# Altium PCB LpfFilter.PcbDoc
Units mil, origin at the board's own origin, x right, y up, seen from the top; angles counter-clockwise.
Board outline 2344.52 x 1602.39 mil, 2 copper layers (Top Layer, Bottom Layer), stack 12.8 mil thick; 16 components, 11 nets, 47 pads, 0 vias.
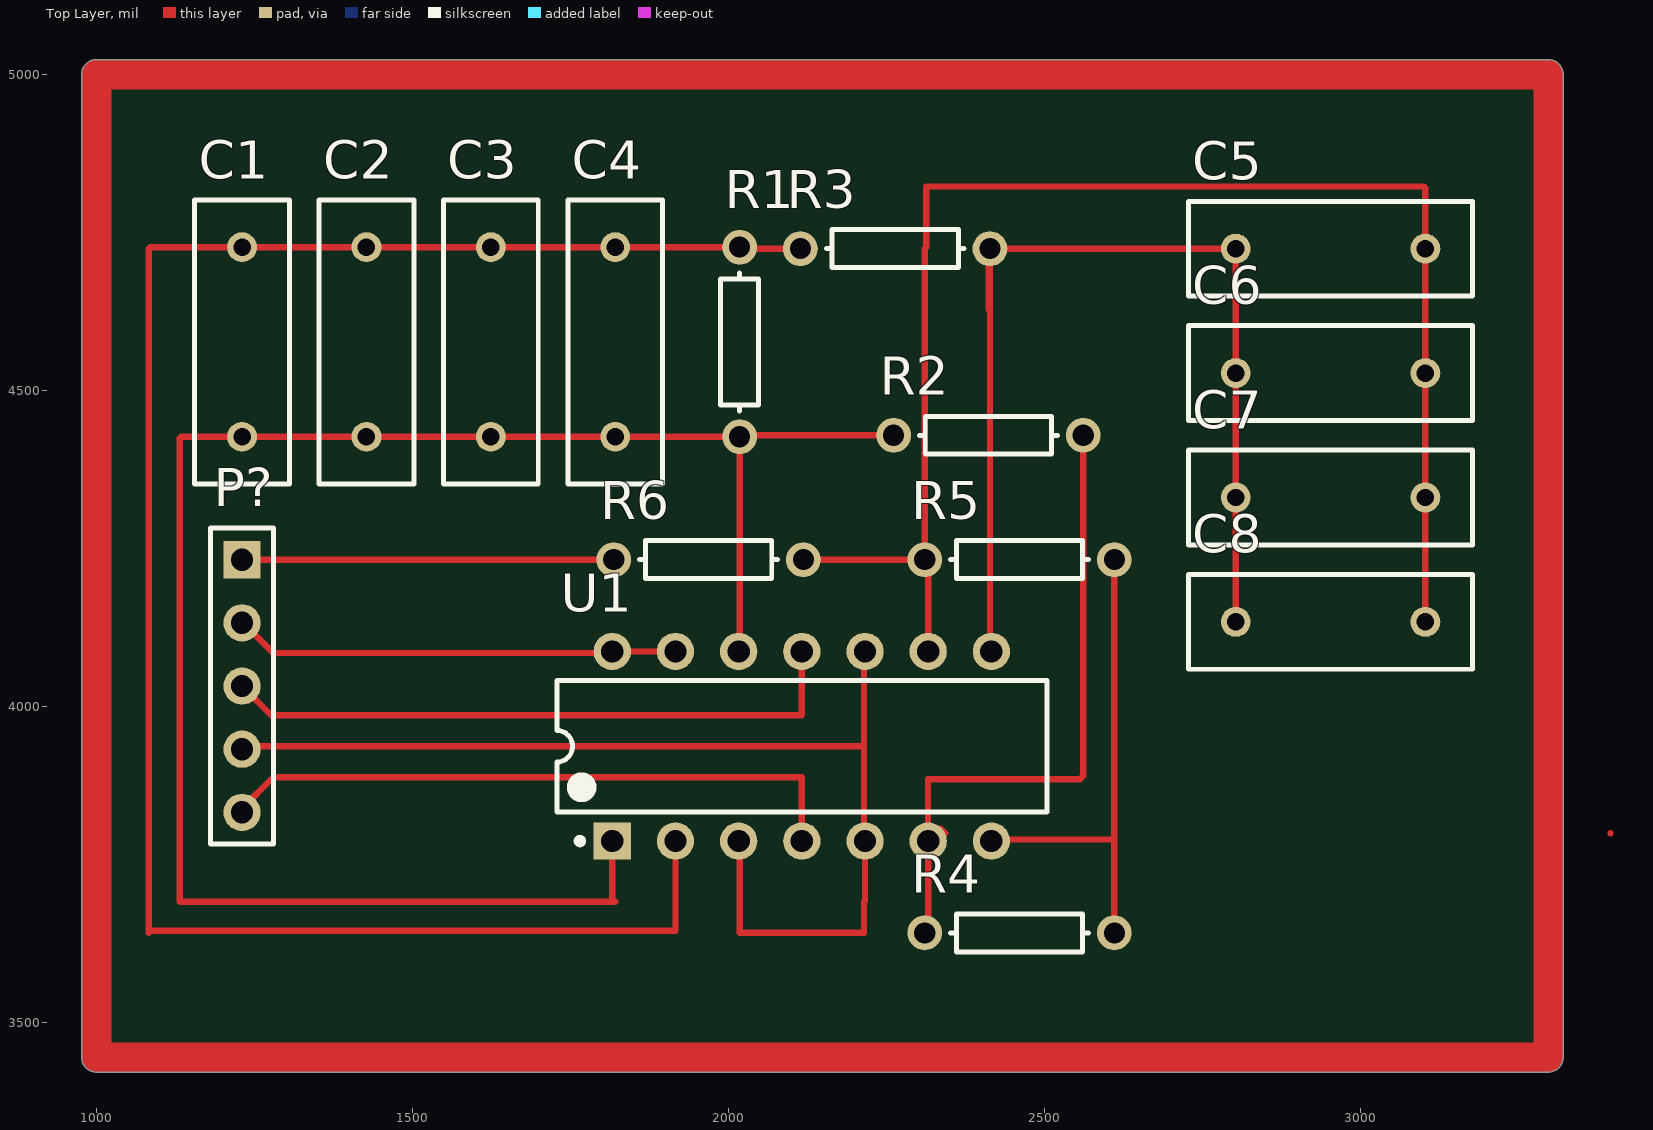
[diagram p0: Top Layer view]
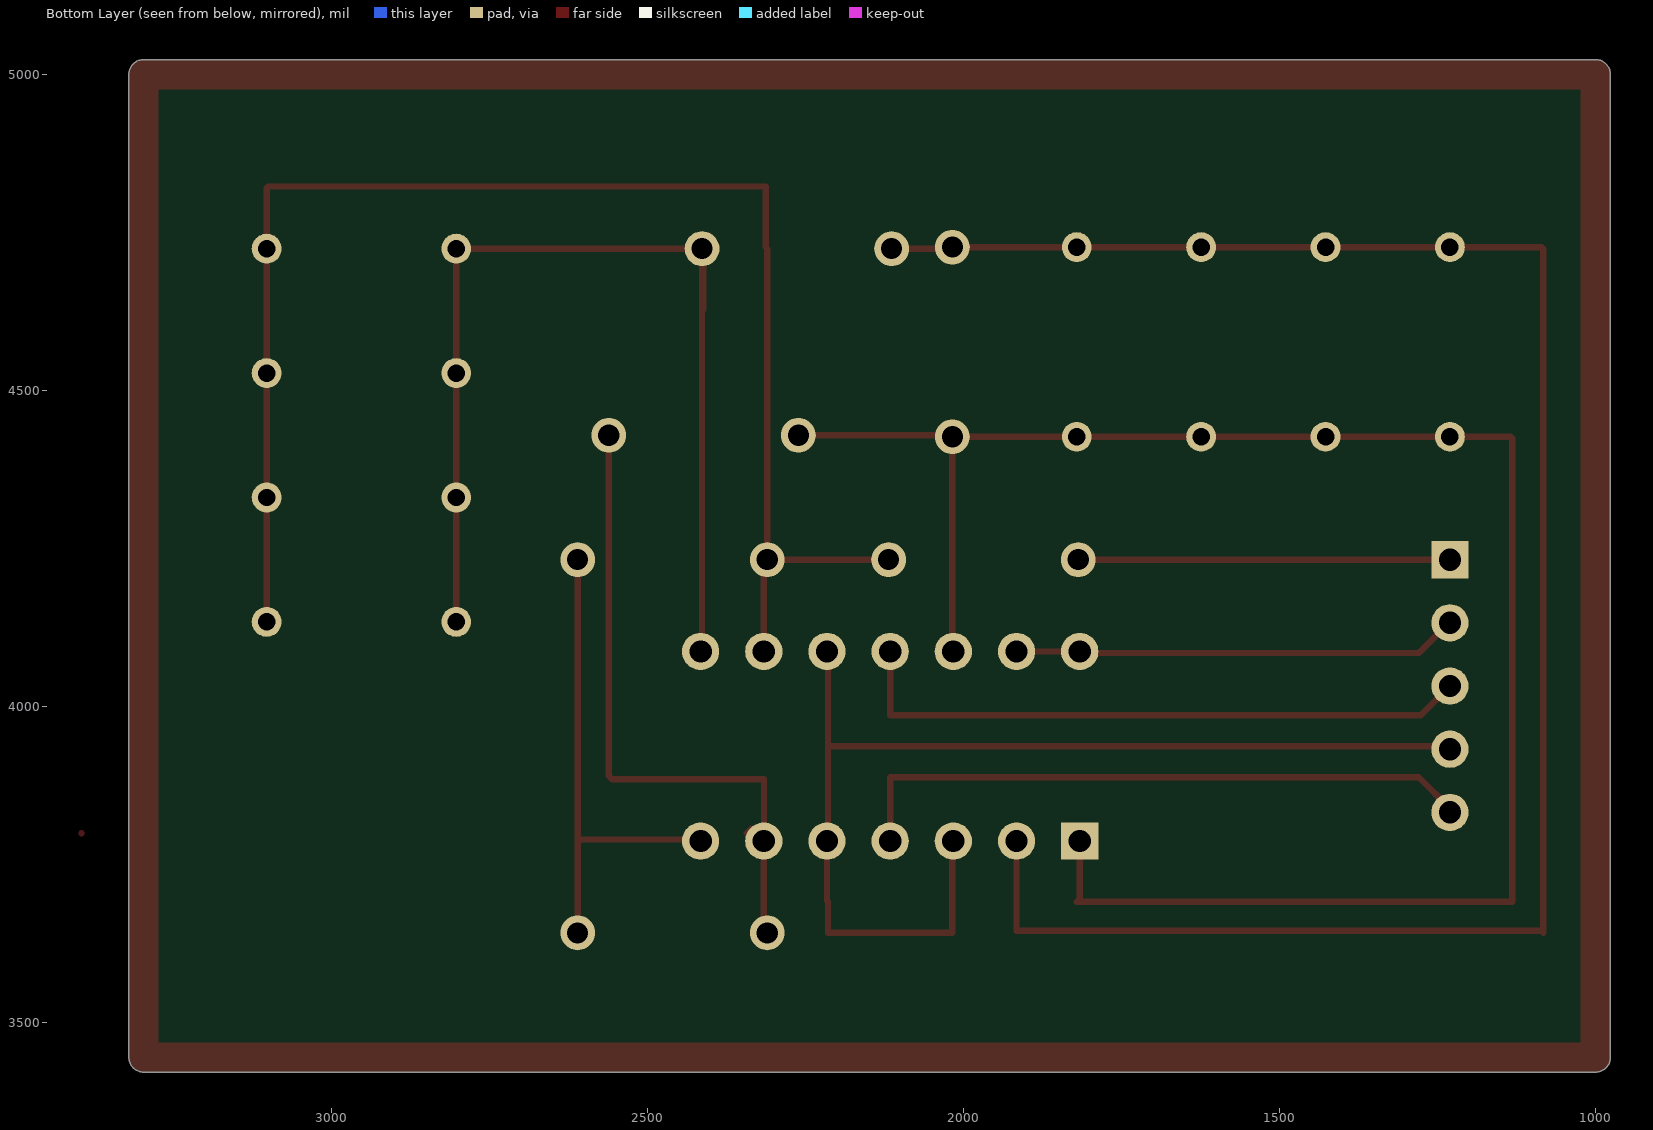
[diagram p1: Bottom Layer view, seen from below]

## Layer stack, top to bottom
Top Solder: solder mask 0.4, Solder Resist, Dk 3.5
Top Layer: signal copper 1.4
Dielectric 1: core 10, FR-4, Dk 4.2
Bottom Layer: signal copper 1.4
Bottom Solder: solder mask 0.4, Solder Resist, Dk 3.5

## Board outline
1000,3421.24 cw(c1000,3444.88) 976.36,3444.88 976.36,5000 cw(c1000,5000) 1000,5023.64 3297.24,5023.64 cw(c3297.24,5000) 3320.88,5000 3320.88,3444.88 cw(c3297.24,3444.88) 3297.24,3421.24

## Design rules (kind name [scope] priority, off if disabled: settings)
Clearance OneL [InNet('GND')] p1: gap=10
Clearance [All] p2: gap=10
PolygonConnect [All] p1: connectstyle=Relief reliefconductorwidth=10 reliefentries=4 polygonreliefangle="90 Angle" airgapwidth=10
RoutingLayers [OnLayer('Bottom Layer')] p1: top layer_v5=TRUE bottom layer_v5=TRUE
RoutingVias [All] p1: holewidth=28 width=50 viastyle="Through Hole" minholewidth=28 minwidth=50 maxholewidth=28 maxwidth=50
SolderMaskExpansion [All] p1: expansion=4
Width [All] p1: maxlimit=10 minlimit=10 preferedwidth=10
28 further rules are at their usual default settings.

## Classes and differential pairs
component class LpfFilter: C1 C2 C3 C4 C5 C6 C7 C8 P? R1 R2 R3 R5 R6 U1

## Components (designator, comment, footprint, x,y, rotation, side; value= is the part's Value field where it differs from the comment)
C1 "Cap" RAD-0.3 1230.32,4576.77 r270 top
C2 "Cap" RAD-0.3 1427.17,4576.77 r270 top
C3 "Cap" RAD-0.3 1624.02,4576.77 r270 top
C4 "Cap" RAD-0.3 1820.87,4576.77 r270 top
C5 "Cap" RAD-0.3 2952.76,4724.41 r180 top
C6 "Cap" RAD-0.3 2952.76,4527.56 r180 top
C7 "Cap" RAD-0.3 2952.76,4330.71 r180 top
C8 "Cap" RAD-0.3 2952.76,4133.86 r180 top
P? "Header 5" HDR1X5 1230.32,4232.28 r270 top
R1 "Res1" AXIAL-0.3 2017.72,4576.77 r270 top
R2 "Res1" AXIAL-0.3 2411.42,4429.13 r0 top
R3 "Res1" AXIAL-0.3 2263.78,4724.41 r0 top
R4 "Res1" AXIAL-0.3 2460.63,3641.73 r0 top
R5 "Res1" AXIAL-0.3 2460.63,4232.28 r180 top
R6 "Res1" AXIAL-0.3 1968.5,4232.28 r0 top
U1 "LM324N" N14A 2116.14,3937.01 r90 top

## Footprints (in the part's own frame and the unit in brackets; to place one, negate y for a bottom-side part, rotate by r counter-clockwise, add the part's x,y. Pads: shape width x height; smd on the part's side, far side on the other; paste and mask are expansions set on the pad)
AXIAL-0.3 [mm] "Axial Device, Thru-Hole; 2 Leads; 0.3 in Pin Spacing"
  round 1.4 hole 0.85: 1(-3.81,0) 2(3.81,0)
  silkscreen extent -2.77,-0.76 2.77,0.76
HDR1X5 [mm] "Connector; Header; 5 Position"
  rect 1.5x1.5 hole 0.9: 1(0,0)
  round 1.5 hole 0.9: 2(2.54,0) 3(5.08,0) 4(7.62,0) 5(10.16,0)
  silkscreen extent -1.27,-1.27 11.43,1.27
N14A [mm] "DIP, 14-Pin, Row Spacing 7.62 mm, Pitch 2.54 mm"
  rect 1.5x1.5 hole 0.9: 1(-3.81,7.62)
  round 1.5 hole 0.9: 2(-3.81,5.08) 3(-3.81,2.54) 4(-3.81,0) 5(-3.81,-2.54) 6(-3.81,-5.08) 7(-3.81,-7.62) 8(3.81,-7.62) 9(3.81,-5.08) 10(3.81,-2.54) 11(3.81,0) 12(3.81,2.54) 13(3.81,5.08) 14(3.81,7.62)
  silkscreen extent -3.93,-9.85 2.65,9.85, body extent -3.55,-9.85 3.55,9.85, height 5.08
RAD-0.3 [mm] "Radial Cap, Thru-Hole; 2 Leads; 0.3 in Pin Spacing"
  round 1.2 hole 0.7: 1(-3.81,0) 2(3.81,0)
  silkscreen extent -5.72,-1.91 5.71,1.9

## Part data
C1 C2 C3 C4 C5 C6 C7 C8: "Capacitor"
P?: "Header, 5-Pin"
R1 R2 R3 R4 R5 R6: "Resistor"
U1: "Low Power Quad Operational Amplifier, 14-pin MDIP"

## Nets (pads, with @x,y where several pads share a name; then routed paths per layer and width w, separated by ;. In a path a pad name is that pad's centre, name@x,y a point inside that pad or via, vN(x,y) a via of type N, cw(c..) or ccw(c..) an arc to the next point about the centre after c; other vN are vias at no path point)
GND: P?.4 U1.3 U1.5 U1.10 | length 1779
  Top Layer w10: P?.4 1230.31,3937.01 2214.57,3937.01 ; U1.3 2017.72,3785.43 2017.72,3641.73 2214.57,3641.73 2214.57,3690.94 2216.14,3692.52 U1.5 2216.14,3787.79 2214.57,3789.37 2214.57,3937.01 ; U1.10 2214.57,4085.43 2214.57,3937.01
NetC1_1: C1.1 C2.1 C3.1 C4.1 R1.1 R3.1 U1.2 | length 3092.6
  Top Layer w10: U1.2 1916.14,3644.88 1085.83,3644.88 1082.68,3641.73 1082.68,4724.41 1085.04,4726.77 C1.1 C2.1 C3.1 C4.1 R1.1 2020.08,4724.41 R3.1
NetC1_2: C1.2 C2.2 C3.2 C4.2 R1.2 R2.1 U1.1 U1.12 | length 2993.7
  Top Layer w10: U1.1 1816.14,3695.67 1820.87,3690.94 1131.89,3690.94 1131.89,4424.41 1134.25,4426.77 C1.2 C2.2 C3.2 C4.2 R1.2 ; U1.12 2017.72,4088.58 R1.2 ; R2.1 2017.72,4429.13 R1.2
NetC5_1: C5.1 C6.1 C7.1 C8.1 R5.2 R6.2 U1.9 | length 2403.1
  Top Layer w10: R6.2 R5.2 2310.63,4724.41 2312.99,4726.77 2312.99,4822.83 3100.39,4822.83 3102.76,4820.47 C5.1 C6.1 C7.1 C8.1 ; U1.9 R5.2@2316.14,4229.13
NetC5_2: C5.2 C6.2 C7.2 C8.2 R3.2 U1.8 | length 1719.7
  Top Layer w10: U1.8 2413.78,4089.37 2413.78,4625.99 ; C8.2 C7.2 C6.2 C5.2 R3.2 ; 2413.78,4625.99 R3.2 ; 2413.78,4625.99 2411.42,4628.35 2411.42,4724.41 R3.2
NetP?_1: P?.1 R6.1 | length 588.2
  Top Layer w10: P?.1 R6.1
NetP?_2: P?.2 U1.13 U1.14 | length 706.5
  Top Layer w10: P?.2 1231.89,4132.28 1279.53,4084.65 1813.78,4084.65 U1.14 U1.13
NetP?_3: P?.3 U1.11 | length 1005.7
  Top Layer w10: P?.3 1276.38,3986.22 2116.14,3986.22 U1.11
NetP?_5: P?.5 U1.4 | length 1022.2
  Top Layer w10: P?.5@1236.61,3838.58 P?.5 1230.31,3838.58 1279.53,3887.8 2116.14,3887.8 U1.4
NetR2_2: R2.2 R4.1 U1.6 | length 1035.7
  Top Layer w10: R4.1 2316.14,3647.25 U1.6 2315.83,3787.32 2315.83,3884.96 2556.22,3884.96 2561.42,3890.16 R2.2 R2.2@2563.78,4431.5
NetR4_2: R4.2 R5.1 U1.7 | length 786
  Top Layer w10: U1.7 2418.5,3789.37 2610.63,3789.37 ; R4.2 2610.63,3789.37 ; R5.1 2610.63,3789.37
copper on no net: | length 7715.3
  Top Layer w10: 2335.83,3806.69 2343.31,3799.21
  Top Layer w47.24: 1000,3444.88 3297.24,3444.88 3297.24,5000 1000,5000 1000,3444.88